# Altium PCB PCB1.PcbDoc
Units mm, origin at the board's own origin, x right, y up, seen from the top; angles counter-clockwise.
Board outline 95 x 95 mm, 2 copper layers (Top Layer, Bottom Layer); 32 components, 53 nets, 150 pads, 4 vias.
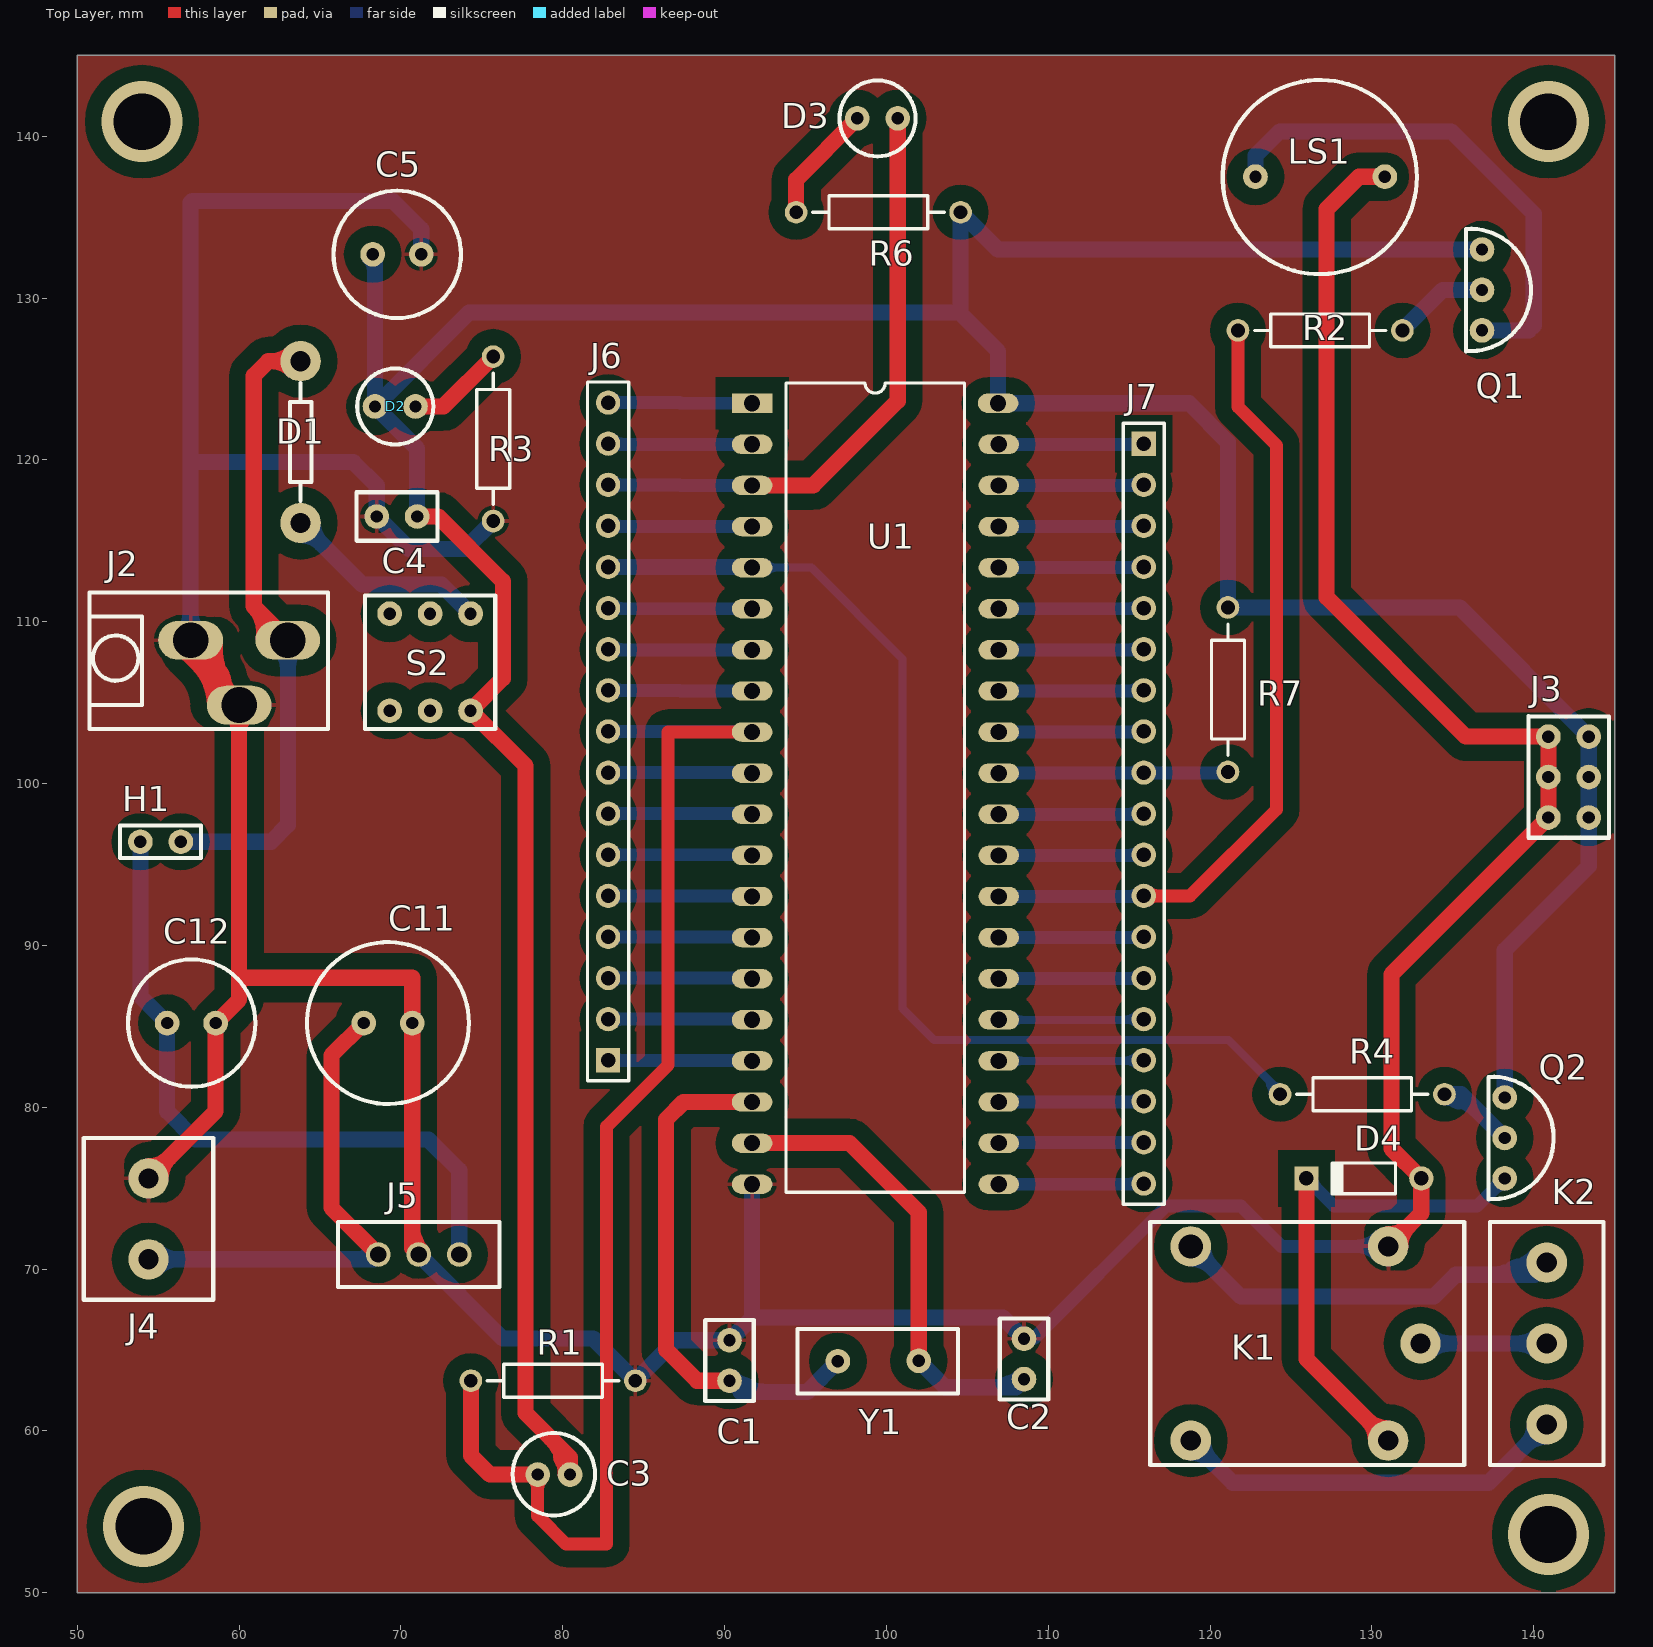
[diagram p0: Top Layer view]
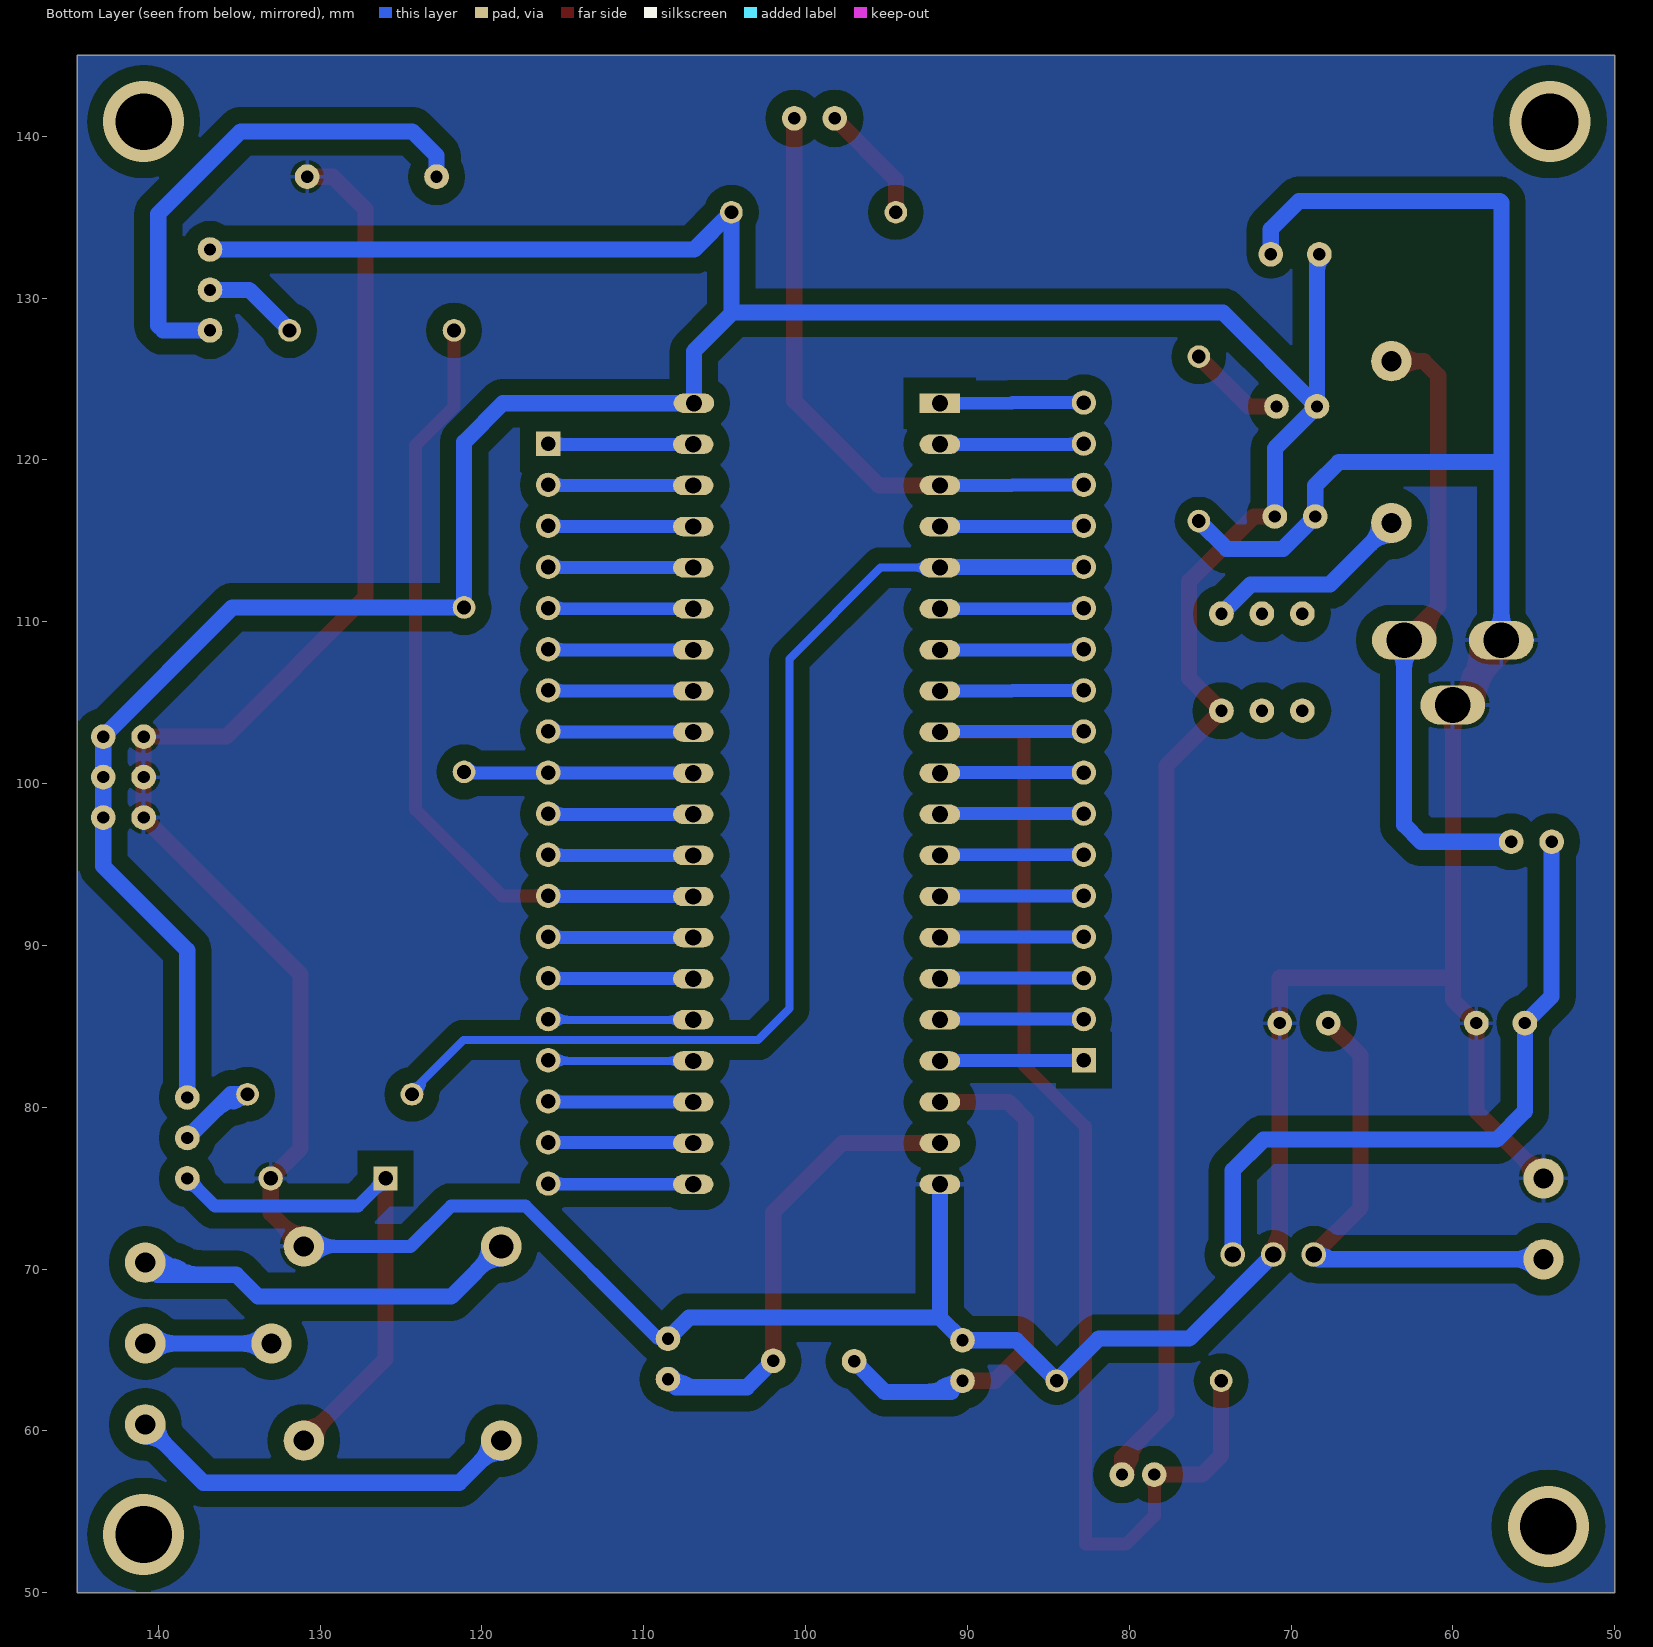
[diagram p1: Bottom Layer view, seen from below]

## Layer stack, top to bottom
Top Layer: signal copper 0.0356
Dielectric: dielectric 0.32, FR-4, Dk 4.8
Bottom Layer: signal copper 0.0356

## Board outline
50,50 50,145 145,145 145,50

## Design rules (kind name [scope] priority, off if disabled: settings)
Clearance Clearance_1 [InPolygon] p1: gap=1
Clearance [All] p2: gap=0.254
PolygonConnect [All] p1: connectstyle=Relief reliefconductorwidth=0.254 reliefentries=4 polygonreliefangle="90 Angle" airgapwidth=0.254
RoutingVias [All] p1: holewidth=0.711 width=1.27 viastyle="Through Hole" minholewidth=0.711 minwidth=1.27 maxholewidth=0.711 maxwidth=1.27
SolderMaskExpansion [All] p1: expansion=0.102
Width [All] p1: maxlimit=2 minlimit=0.2 preferedwidth=1 minimp=50.000000 maximp=50.000000 favimp=50.000000
28 further rules are at their usual default settings.

## Components (designator, comment, footprint, x,y, rotation, side; value= is the part's Value field where it differs from the comment)
C1 "Cap" CAP_104 90.3,65.6 r270 top
C2 "Cap" CAP_104 108.5,65.7 r270 top
C3 "Cap2" CAP_10UF 80.7,57.3 r180 top
C4 "Cap" CAP_104 68.5,116.5 r0 top
C5 "Cap2" Cap_100uF 68.5,132.7 r0 top
C11 "Cap_100uF" CAP_1000UF 69.2,85.2 r0 top
C12 "Cap_100uF" Cap_100uF 55.8,85.2 r0 top
D1 "Diode 1N5408" IN5819 63.8,126.1 r270 top
D2 "LED0" LED 68.4,123.3 r0 top
D3 "LED0" LED 98.2,141.1 r0 top
D4 "Diode 1N4148" DO-35 129.5,75.6 r180 top
H1 "Header 2H" Head2 53.9,96.4 r0 top
J2 "Header 3" POWER_DC5V 65.5,112.1 r180 top
J3 "JPW" JPW 140.9,102.9 r0 top
J4 "Power_DC12V" Power_DC12V 54.4,70.6 r180 top
J5 "7805" 7805 68.6,70.9 r90 top
J6 "Header 17" HDR1X17 82.8,82.9 r90 top
J7 "Header 19" HDR1X19 115.9,121 r270 top
K1 "Relay" Relay 118.8,65.4 r0 top
K2 "CRelay" CRelay 140.8,60.4 r90 top
LS1 "Speaker" Speaker 124.3,137.5 r0 top
Q1 "2N3906" 8550 136.8,133 r270 top
Q2 "2N3906" 8550 138.2,80.6 r270 top
R1 "Res2" AXIAL-0.4 79.4,63.1 r180 top
R2 "Res2" AXIAL-0.4 126.8,128 r0 top
R3 "Res2" AXIAL-0.4 75.7,121.3 r90 top
R4 "Res2" AXIAL-0.4 129.4,80.8 r180 top
R6 "Res2" AXIAL-0.4 99.5,135.3 r180 top
R7 "Res2" AXIAL-0.4 121.1,105.8 r90 top
S2 "SW6" SW6 69.3,110.5 r0 top
U1 "MCU" MCU 91.7,123.5 r0 top
Y1 "XTAL" crystals 97,64.3 r0 top

## Footprints (in the part's own frame and the unit in brackets; to place one, negate y for a bottom-side part, rotate by r counter-clockwise, add the part's x,y. Pads: shape width x height; smd on the part's side, far side on the other; paste and mask are expansions set on the pad)
7805 [mil]
  round 60 hole 39.37: 1(0,0) 2(0,-98.42) 3(0,-196.85)
  silkscreen extent -79,-295 79,98
8550 [mil]
  round 60 hole 30: 1(0,0) 2(98.42,0) 3(196.85,0)
  silkscreen extent -50,-39 248,119
AXIAL-0.4 [mm] "Axial Device, Thru-Hole; 2 Leads; 0.4 in Pin Spacing"
  round 1.4 hole 0.85: 1(-5.08,0) 2(5.08,0)
  silkscreen extent -4.06,-1.02 4.06,1.02
CAP_10UF [mil]
  round 60 hole 30: 1(9.84,0) 2(88.58,0)
  silkscreen extent -51,-101 150,99
Cap_100uF [mil]
  round 60 hole 30: 1(-9.84,0) 2(108.27,0)
  silkscreen extent -105,-155 205,155
CAP_104 [mil]
  round 60 hole 30: 1(0,0) 2(98.43,0)
  silkscreen extent -49,-59 148,59
CAP_1000UF [mil]
  round 60 hole 30: 1(-59.06,0) 2(59.05,0)
  silkscreen extent -197,-197 197,197
CRelay [mm]
  round 2.5 hole 1.25: 1(0,0) 2(5,0) 3(10,0)
  silkscreen extent -2.5,-3.5 12.5,3.5
crystals [mil]
  round 60 hole 30: 1(0,0) 2(196.85,0.98)
  silkscreen extent -98,-79 292,79
DO-35 [mm] "Diode, Axial; Body 3.8 x 1.9 mm (LxDia. max), Lead Dia. 0.53 mm (max)"
  round 1.5 hole 0.9: 1(-3.55,0)
  rect 1.5x1.5 hole 0.9: 2(3.55,0)
  silkscreen extent -1.95,-0.95 2.05,0.95
HDR1X17 [mm] "Connector; Header; 17 Position"
  rect 1.5x1.5 hole 0.9: 1(0,0)
  round 1.5 hole 0.9: 2(2.54,0) 3(5.08,0) 4(7.62,0) 5(10.16,0) 6(12.7,0) 7(15.24,0) 8(17.78,0) 9(20.32,0) 10(22.86,0) 11(25.4,0) 12(27.94,0) 13(30.48,0) 14(33.02,0) 15(35.56,0) 16(38.1,0) 17(40.64,0)
  silkscreen extent -1.27,-1.27 41.91,1.27
HDR1X19 [mm] "Connector; Header; 19 Position"
  rect 1.5x1.5 hole 0.9: 1(0,0)
  round 1.5 hole 0.9: 2(2.54,0) 3(5.08,0) 4(7.62,0) 5(10.16,0) 6(12.7,0) 7(15.24,0) 8(17.78,0) 9(20.32,0) 10(22.86,0) 11(25.4,0) 12(27.94,0) 13(30.48,0) 14(33.02,0) 15(35.56,0) 16(38.1,0) 17(40.64,0) 18(43.18,0) 19(45.72,0)
  silkscreen extent -1.27,-1.27 46.99,1.27
Head2 [mil]
  round 60 hole 30: 1(0,0) 2(98.42,0)
  silkscreen extent -49,-39 148,39
IN5819 [mm]
  round 2.5 hole 1.25: 1(0,0) 2(10,0)
  silkscreen extent 1.35,-0.65 8.62,0.68
JPW [mil]
  round 60 hole 30: 1(0,0) 2(98.43,0) 3(0,-98.43) 4(98.43,-98.43) 5(0,-196.85) 6(98.43,-196.85)
  silkscreen extent -48,-246 148,50
LED [mil]
  round 60 hole 30: 1(0,0) 2(98.42,0)
  silkscreen extent -43,-93 142,93
MCU [mm] "STC89C52RC"
  rect 2.5x1.2 hole 1: 1(0,0)
  oval 2.5x1.2 hole 1: 2(0,-2.54) 3(0,-5.08) 4(0,-7.62) 5(0,-10.16) 6(0,-12.7) 7(0,-15.24) 8(0,-17.78) 9(0,-20.32) 10(0,-22.86) 11(0,-25.4) 12(0,-27.94) 13(0,-30.48) 14(0,-33.02) 15(0,-35.56) 16(0,-38.1) 17(0,-40.64) 18(0,-43.18) 19(0,-45.72) 20(0,-48.26) 21(15.24,-48.26) 22(15.24,-45.72) 23(15.24,-43.18) 24(15.24,-40.64) 25(15.24,-38.1) 26(15.24,-35.56) 27(15.24,-33.02) 28(15.24,-30.48) 29(15.24,-27.94) 30(15.24,-25.4) 31(15.24,-22.86) 32(15.24,-20.32) 33(15.24,-17.78) 34(15.24,-15.24) 35(15.24,-12.7) 36(15.24,-10.16) 37(15.24,-7.62) 38(15.24,-5.08) 39(15.24,-2.54) 40(15.2,0)
  silkscreen extent 2.08,-48.75 13.11,1.25
POWER_DC5V [mm]
  oval 4x2.4 hole 2.2: 1(2.5,3.25) 2(8.5,3.25) 3(5.5,7.25)
  silkscreen extent 0,0.3 14.75,8.72
Power_DC12V [mm]
  round 2.5 hole 1.25: 1(0,0) 2(0,-5)
  silkscreen extent -4,-7.5 4,2.5
Relay [mm] "HLS8L-DC5V-S-C"
  round 2.5 hole 1.25: 1(14.2,0) 3(0,-6) 4(12.2,6) 5(12.2,-6)
  round 2.5 hole 1.5: 2(0,6)
  silkscreen extent -2.5,-7.5 16.9,7.5
Speaker [mil]
  round 60 hole 30: 1(-59.05,0) 2(255.91,0)
  silkscreen extent -139,-237 334,235
SW6 [mil]
  round 60 hole 30: 1(0,0) 2(98.43,0) 3(196.85,0) 4(0,-236.22) 5(98.43,-236.22) 6(196.85,-236.22)
  silkscreen extent -60,-281 257,44

## Part data
C1 C2: "Capacitor"
C3 C5: "Polarized Capacitor (Axial)"
C4: "104"
D1: "3 Amp Medium Power Silicon Rectifier Diode"
D2 D3: "Typical INFRARED GaAs LED"
D4: "High Conductance Fast Diode"
H1: "Header, 2-Pin, Right Angle"
J2: "Header, 3-Pin"
J6: "Header, 17-Pin"
J7: "Header, 19-Pin"
K1: "HLS8L-DC5V-S-C"
LS1: "Loudspeaker"
Q1 Q2: "PNP8550"
R1 R2 R3 R4 R6 R7: "Resistor"
U1: "STC89C52RC"
Y1: "Crystal Oscillator"

## Via types
v1: diameter 5, hole 3.5, Top Layer to Bottom Layer, 4 vias

## Nets (pads, with @x,y where several pads share a name; then routed paths per layer and width w, separated by ;. In a path a pad name is that pad's centre, name@x,y a point inside that pad or via, vN(x,y) a via of type N, cw(c..) or ccw(c..) an arc to the next point about the centre after c; other vN are vias at no path point)
GND: C1.1 C2.1 C4.1 C5.2 C11.2 C12.2 D4.1 J2.2 J2.3 J3.1 J3.3 J3.5 J4.2 J5.2 K1.4 LS1.2 R1.1 R3.1 U1.20 | length 350.4
  Top Layer w0.254: J2.2@57,107.85 J2.2
  Top Layer w1: J4.2 58.55,79.75 C12.2 60,86.65 ; J2.2@57,107.85 J2.3 ; J2.2@57.414,108.266 cw(c55.21,104.93) J2.3@59.127,105.73 ; J2.3@58.691,105.331 ccw(c57.781,106.19) 58.865,106.816 ; 60,86.9 J2.3 ; 60.1,88 70.7,88 C11.2 70.7,71.3 J5.2 ; 70.841,71.854 cw(c70.077,71.413) J5.2@70.866,71.017 ; LS1.2 129.2,137.5 127.2,135.5 127.2,111.5 135.8,102.9 J3.1 J3.3 J3.5 131.2,88.2 131.2,77.45 D4.1 133.05,73.45 K1.4 ; 55.68,76.88 cw(c54.4,78.161) 54.4,76.35 ccw(c54.4,78.161) 55.68,76.88 ; 55.68,76.88 ccw(c56.961,75.6) 55.15,75.6 cw(c56.961,75.6) 55.68,76.88 ; 60,103.16 cw(c61.69,103.16) 60.495,104.355 ccw(c61.69,103.16) 60,103.16 ; 60,103.16 ccw(c58.31,103.16) 59.505,104.355 cw(c58.31,103.16) 60,103.16 ; J2.3 cw(c63.647,108.497) 58.499,108.808 ccw(c63.647,108.497) J2.3 ; 132.28,72.68 cw(c131,73.961) 131,72.15 ccw(c131,73.961) 132.28,72.68 ; 132.28,72.68 ccw(c133.561,71.4) 131.75,71.4 cw(c133.561,71.4) 132.28,72.68 ; J2.2@56.502,108.928 ccw(c57.719,108.855) 56.857,107.993 cw(c57.719,108.855) J2.2@56.502,108.928 ; 57.439,107.411 cw(c54.879,104.85) 58.5,104.85 ccw(c54.879,104.85) 57.439,107.411 ; J2.2@57.501,108.868 ccw(c60.683,108.676) 58.429,106.421 cw(c60.683,108.676) J2.2@57.501,108.868 ; 70.7,72.498 ccw(c72.698,72.498) 71.285,71.085 cw(c72.698,72.498) 70.7,72.498
  Bottom Layer w0.254: J2.2@56.998,108.85 J2.2
  Bottom Layer w0.8: C2.1 109.1,65.7 117.3,73.9 121.9,73.9 124.4,71.4 K1.4 ; 128.948,71.4 cw(c128.948,69.348) 130.399,70.799 ccw(c128.948,69.348) 128.948,71.4 ; 128.948,71.4 ccw(c128.948,73.452) 130.399,72.001 cw(c128.948,73.452) 128.948,71.4
  Bottom Layer w1: J2.2@56.998,108.85 56.998,117.932 ; 56.998,118.002 56.998,135.898 57.1,136 69.5,136 71.25,134.25 C5.2 ; 57.135,119.863 67.056,119.863 68.5,118.419 C4.1 70.5,114.5 73.98,114.5 R3.1 ; J5.2 76.3,65.7 81.88,65.7 R1.1 86.98,65.6 C1.1 91.7,67 ; U1.20 91.7,67 ; C2.1 107.2,67 91.7,67 ; J2.2@56.505,109.345 ccw(c55.316,110.534) 56.998,110.534 cw(c55.316,110.534) J2.2@56.505,109.345 ; 56.998,110.546 ccw(c58.696,110.546) 57.495,109.345 cw(c58.696,110.546) 56.998,110.546
NetC1_2: C1.2 U1.18 Y1.1 | length 38.4
  Top Layer w1: C1.2 88.3,63.1 86.385,65.015 86.385,79.248 87.457,80.32 U1.18
  Bottom Layer w0.254: C1.2 91,62.4
  Bottom Layer w1: C1.2@90.368,62.847 cw(c90.755,61.401) 91.503,62.697 ; 91,62.4 95.1,62.4 Y1.1 ; C1.2@90.485,63.285 ccw(c92.622,65.422) 92.622,62.4 cw(c92.622,65.422) C1.2@90.485,63.285
NetC2_2: C2.2 U1.19 Y1.2 | length 33.4
  Top Layer w1: U1.19 97.72,77.78 102,73.5 Y1.2
  Bottom Layer w0.254: C2.2@108,62.7 C2.2
  Bottom Layer w1: Y1.2 103.625,62.7 C2.2@108,62.7 ; 107.392,62.853 cw(c108.013,61.778) C2.2@108.415,62.952 ; 106.66,62.7 ccw(c106.66,65.04) 108.315,63.385 cw(c106.66,65.04) 106.66,62.7
NetC3_2: C3.2 J6.9 R1.2 U1.9 | length 88.2
  Top Layer w0.8: C3.2 78.45,54.75 80.2,53 82.7,53 82.7,78.8 86.5,82.6 86.5,103.18 U1.9@91.9,103.18 ; 78.45,56.426 cw(c79.324,56.426) 78.706,57.044 ccw(c79.324,56.426) 78.45,56.426 ; 78.45,56.426 ccw(c77.576,56.426) 78.194,57.044 cw(c77.576,56.426) 78.45,56.426
  Top Layer w1: R1.2 74.32,58.48 75.5,57.3 C3.2
  Bottom Layer w0.8: J6.9 U1.9@91.66,103.22 ; 83.645,103.22 cw(c83.645,104.065) 83.047,103.467 ccw(c83.645,104.065) 83.645,103.22 ; 83.645,103.22 ccw(c83.645,102.375) 83.047,102.973 cw(c83.645,102.375) 83.645,103.22
NetC11_1: C11.1 J4.1 J5.1 | length 39.2
  Top Layer w1: C11.1 65.7,83.2 65.7,73.8 J5.1
  Bottom Layer w1: J4.1 J5.1@68.3,70.6 ; 67.799,70.73 cw(c68.091,70.223) J5.1@68.443,70.691 ; 56.211,70.6 cw(c56.211,72.411) 54.93,71.13 ccw(c56.211,72.411) 56.211,70.6 ; 56.211,70.6 ccw(c56.211,68.789) 54.93,70.07 cw(c56.211,68.789) 56.211,70.6 ; 67.243,70.6 ccw(c67.243,72.257) 68.415,71.085 cw(c67.243,72.257) 67.243,70.6
NetC12_1: C12.1 H1.1 J5.3 | length 42.1
  Bottom Layer w1: H1.1 53.9,86.85 C12.1 55.55,79.75 57.3,78 71.7,78 73.6,76.1 J5.3
NetD1_1: D1.1 H1.2 J2.1 | length 54.3
  Top Layer w1: J2.1 60.9,110.95 ; D1.1 61.8,126.1 60.9,125.2 60.9,110.95 ; 60.9,110.95 cw(c59.333,109.383) 61.512,108.978 ccw(c59.333,109.383) 60.9,110.95 ; 61.989,126.1 cw(c61.989,124.289) 63.27,125.57 ccw(c61.989,124.289) 61.989,126.1 ; 61.989,126.1 ccw(c61.989,127.911) 63.27,126.63 cw(c61.989,127.911) 61.989,126.1
  Bottom Layer w0.254: J2.1 J2.1@63.017,108.85
  Bottom Layer w1: H1.2 61.976,96.4 63.017,97.441 J2.1@63.017,108.85 ; J2.1@62.505,108.355 cw(c61.268,107.118) 63.017,107.118 ccw(c61.268,107.118) J2.1@62.505,108.355 ; 63.017,107.202 cw(c64.648,107.202) 63.495,108.355 ccw(c64.648,107.202) 63.017,107.202
NetD1_2: D1.2 S2.3 | length 18.5
  Bottom Layer w1: D1.2 67.6,112.3 72.5,112.3 S2.3 ; 65.08,114.82 cw(c66.361,116.1) 64.55,116.1 ccw(c66.361,116.1) 65.08,114.82 ; 65.08,114.82 ccw(c63.8,113.539) 63.8,115.35 cw(c63.8,113.539) 65.08,114.82
NetD2_2: D2.2 R3.2 | length 6.1
  Top Layer w1: D2.2 72.62,123.3 R3.2
NetD3_1: D3.1 R6.2 | length 7.4
  Top Layer w1: R6.2 94.42,137.32 D3.1
NetD3_2: D3.2 J6.15 U1.3 | length 40.2
  Top Layer w1: U1.3 95.479,118.42 100.7,123.641 D3.2
  Bottom Layer w0.254: 87.224,118.46 87.264,118.42
  Bottom Layer w0.8: J6.15 87.224,118.46 ; 87.264,118.42 U1.3 ; 83.645,118.46 cw(c83.645,119.305) 83.047,118.707 ccw(c83.645,119.305) 83.645,118.46 ; 83.645,118.46 ccw(c83.645,117.615) 83.047,118.213 cw(c83.645,117.615) 83.645,118.46
NetD4_2: D4.2 K1.5 Q2.3 | length 43
  Top Layer w1: D4.2 125.95,64.45 K1.5 ; 129.72,60.68 cw(c128.439,59.4) 130.25,59.4 ccw(c128.439,59.4) 129.72,60.68 ; 129.72,60.68 ccw(c131,61.961) 131,60.15 cw(c131,61.961) 129.72,60.68
  Bottom Layer w0.8: D4.2 127.65,73.9 136.5,73.9 Q2.3 ; D4.2@126.548,75.003 cw(c127.145,75.6) 126.3,75.6 ccw(c127.145,75.6) D4.2@126.548,75.003 ; D4.2@126.548,75.003 ccw(c125.95,74.405) 125.95,75.25 cw(c125.95,74.405) D4.2@126.548,75.003 ; 137.582,74.982 cw(c138.2,74.364) 138.2,75.238 ccw(c138.2,74.364) 137.582,74.982 ; 137.582,74.982 ccw(c136.964,75.6) 137.838,75.6 cw(c136.964,75.6) 137.582,74.982
NetJ6_1: J6.1 U1.17 | length 11.5
  Bottom Layer w0.8: J6.1 U1.17@91.66,82.9 ; 83.645,82.9 cw(c83.645,83.745) 83.047,83.147 ccw(c83.645,83.745) 83.645,82.9 ; 83.645,82.9 ccw(c83.645,82.055) 83.047,82.653 cw(c83.645,82.055) 83.645,82.9
NetJ6_2: J6.2 U1.16 | length 11.5
  Bottom Layer w0.8: J6.2 U1.16@91.66,85.44 ; 83.645,85.44 cw(c83.645,86.285) 83.047,85.687 ccw(c83.645,86.285) 83.645,85.44 ; 83.645,85.44 ccw(c83.645,84.595) 83.047,85.193 cw(c83.645,84.595) 83.645,85.44
NetJ6_3: J6.3 U1.15 | length 11.5
  Bottom Layer w0.8: J6.3 U1.15@91.66,87.98 ; 83.645,87.98 cw(c83.645,88.825) 83.047,88.227 ccw(c83.645,88.825) 83.645,87.98 ; 83.645,87.98 ccw(c83.645,87.135) 83.047,87.733 cw(c83.645,87.135) 83.645,87.98
NetJ6_4: J6.4 U1.14 | length 11.5
  Bottom Layer w0.8: J6.4 U1.14@91.66,90.52 ; 83.645,90.52 cw(c83.645,91.365) 83.047,90.767 ccw(c83.645,91.365) 83.645,90.52 ; 83.645,90.52 ccw(c83.645,89.675) 83.047,90.273 cw(c83.645,89.675) 83.645,90.52
NetJ6_5: J6.5 U1.13 | length 11.5
  Bottom Layer w0.8: J6.5 U1.13@91.66,93.06 ; 83.645,93.06 cw(c83.645,93.905) 83.047,93.307 ccw(c83.645,93.905) 83.645,93.06 ; 83.645,93.06 ccw(c83.645,92.215) 83.047,92.813 cw(c83.645,92.215) 83.645,93.06
NetJ6_6: J6.6 U1.12 | length 11.5
  Bottom Layer w0.8: J6.6 U1.12@91.66,95.6 ; 83.645,95.6 cw(c83.645,96.445) 83.047,95.847 ccw(c83.645,96.445) 83.645,95.6 ; 83.645,95.6 ccw(c83.645,94.755) 83.047,95.353 cw(c83.645,94.755) 83.645,95.6
NetJ6_7: J6.7 U1.11 | length 11.5
  Bottom Layer w0.8: J6.7 U1.11@91.66,98.14 ; 83.645,98.14 cw(c83.645,98.985) 83.047,98.387 ccw(c83.645,98.985) 83.645,98.14 ; 83.645,98.14 ccw(c83.645,97.295) 83.047,97.893 cw(c83.645,97.295) 83.645,98.14
NetJ6_8: J6.8 U1.10 | length 11.5
  Bottom Layer w0.8: J6.8 U1.10@91.66,100.68 ; 83.645,100.68 cw(c83.645,101.525) 83.047,100.927 ccw(c83.645,101.525) 83.645,100.68 ; 83.645,100.68 ccw(c83.645,99.835) 83.047,100.433 cw(c83.645,99.835) 83.645,100.68
NetJ6_10: J6.10 U1.8 | length 11.6
  Bottom Layer w0.254: 87.224,105.76 87.264,105.72
  Bottom Layer w0.8: J6.10 87.224,105.76 ; 87.264,105.72 U1.8 ; 83.645,105.76 cw(c83.645,106.605) 83.047,106.007 ccw(c83.645,106.605) 83.645,105.76 ; 83.645,105.76 ccw(c83.645,104.915) 83.047,105.513 cw(c83.645,104.915) 83.645,105.76
NetJ6_11: J6.11 U1.7 | length 10.5
  Bottom Layer w0.8: J6.11 82.84,108.26 U1.7 ; J6.11@83.047,108.547 ccw(c83.742,109.242) 83.742,108.26 cw(c83.742,109.242) J6.11@83.047,108.547
NetJ6_12: J6.12 U1.6 | length 10.5
  Bottom Layer w0.8: J6.12 82.84,110.8 U1.6 ; J6.12@83.047,111.087 ccw(c83.742,111.782) 83.742,110.8 cw(c83.742,111.782) J6.12@83.047,111.087
NetJ6_13: J6.13 R4.2 U1.5 | length 74.7
  Bottom Layer w0.5: U1.5 95.36,113.34 101,107.7 101,86.1 102.946,84.154 121.146,84.154 124.32,80.98 R4.2 ; 123.714,81.383 ccw(c124.599,81.621) R4.2@124.304,80.753 ; 93.195,113.34 cw(c93.195,114.185) 92.597,113.587 ccw(c93.195,114.185) 93.195,113.34 ; 93.195,113.34 ccw(c93.195,112.495) 92.597,113.092 cw(c93.195,112.495) 93.195,113.34 ; 123.425,81.875 cw(c122.349,80.8) 123.87,80.8 ccw(c122.349,80.8) 123.425,81.875 ; 123.859,81.441 ccw(c124.32,81.902) 124.32,81.25 cw(c124.32,81.902) 123.859,81.441
  Bottom Layer w1: J6.13 U1.5@91.66,113.38
NetJ6_14: J6.14 U1.4 | length 10.5
  Bottom Layer w0.254: 87.224,115.92 87.264,115.88
  Bottom Layer w0.8: J6.14@82.84,115.88 87.264,115.88 U1.4 ; J6.14@83.047,116.167 ccw(c83.742,116.862) 83.742,115.88 cw(c83.742,116.862) J6.14@83.047,116.167
NetJ6_16: J6.16 U1.2 | length 10.5
  Bottom Layer w0.8: J6.16 82.84,120.96 U1.2 ; J6.16@83.047,121.247 ccw(c83.742,121.942) 83.742,120.96 cw(c83.742,121.942) J6.16@83.047,121.247
NetJ6_17: J6.17 U1.1 | length 11.6
  Bottom Layer w0.254: 87.224,123.54 87.264,123.5
  Bottom Layer w0.8: J6.17 87.224,123.54 ; 87.264,123.5 U1.1 ; 83.645,123.54 cw(c83.645,124.385) 83.047,123.787 ccw(c83.645,124.385) 83.645,123.54 ; 83.645,123.54 ccw(c83.645,122.695) 83.047,123.293 cw(c83.645,122.695) 83.645,123.54
NetJ7_1: J7.1 U1.39 | length 10.5
  Bottom Layer w0.8: U1.39 115.86,120.96 J7.1 ; 114.958,120.96 ccw(c114.958,121.942) 115.653,121.247 cw(c114.958,121.942) 114.958,120.96
NetJ7_2: J7.2 U1.38 | length 10.5
  Bottom Layer w0.8: U1.38 J7.2@115.86,118.42 ; 114.958,118.42 ccw(c114.958,119.402) 115.653,118.707 cw(c114.958,119.402) 114.958,118.42
NetJ7_3: J7.3 U1.37 | length 10.5
  Bottom Layer w0.8: U1.37 J7.3@115.86,115.88 ; 114.958,115.88 ccw(c114.958,116.862) 115.653,116.167 cw(c114.958,116.862) 114.958,115.88
NetJ7_4: J7.4 U1.36 | length 10.5
  Bottom Layer w0.8: U1.36 J7.4@115.86,113.34 ; 114.958,113.34 ccw(c114.958,114.322) 115.653,113.627 cw(c114.958,114.322) 114.958,113.34
NetJ7_5: J7.5 U1.35 | length 10.5
  Bottom Layer w0.8: U1.35 J7.5@115.86,110.8 ; 114.958,110.8 ccw(c114.958,111.782) 115.653,111.087 cw(c114.958,111.782) 114.958,110.8
NetJ7_6: J7.6 U1.34 | length 10.5
  Bottom Layer w0.8: U1.34 J7.6@115.86,108.26 ; 114.958,108.26 ccw(c114.958,109.242) 115.653,108.547 cw(c114.958,109.242) 114.958,108.26
NetJ7_7: J7.7 U1.33 | length 10.5
  Bottom Layer w0.8: U1.33 J7.7@115.86,105.72 ; 114.958,105.72 ccw(c114.958,106.702) 115.653,106.007 cw(c114.958,106.702) 114.958,105.72
NetJ7_8: J7.8 U1.32 | length 10.5
  Bottom Layer w0.8: U1.32 J7.8@115.86,103.18 ; 114.958,103.18 ccw(c114.958,104.162) 115.653,103.467 cw(c114.958,104.162) 114.958,103.18
NetJ7_9: J7.9 R7.1 U1.31 | length 18.8
  Bottom Layer w0.8: U1.31 121.02,100.64 R7.1 ; 114.958,100.64 ccw(c114.958,101.622) 115.653,100.927 cw(c114.958,101.622) 114.958,100.64 ; J7.9@116.147,100.927 ccw(c116.842,101.622) 116.842,100.64 cw(c116.842,101.622) J7.9@116.147,100.927 ; 120.183,100.64 ccw(c120.183,101.637) 120.888,100.932 cw(c120.183,101.637) 120.183,100.64
NetJ7_10: J7.10 U1.30 | length 10.5
  Bottom Layer w0.8: U1.30 J7.10@115.86,98.1 ; 114.958,98.1 ccw(c114.958,99.082) 115.653,98.387 cw(c114.958,99.082) 114.958,98.1
NetJ7_11: J7.11 U1.29 | length 10.5
  Bottom Layer w0.8: U1.29 J7.11@115.86,95.56 ; 114.958,95.56 ccw(c114.958,96.542) 115.653,95.847 cw(c114.958,96.542) 114.958,95.56
NetJ7_12: J7.12 R2.1 U1.28 | length 56.4
  Top Layer w0.8: J7.12 118.76,93.06 124.1,98.4 124.1,120.9 121.72,123.28 R2.1 ; 116.745,93.06 cw(c116.745,93.905) 116.147,93.307 ccw(c116.745,93.905) 116.745,93.06 ; 116.745,93.06 ccw(c116.745,92.215) 116.147,92.813 cw(c116.745,92.215) 116.745,93.06 ; 121.72,127.276 cw(c122.444,127.276) 121.932,127.788 ccw(c122.444,127.276) 121.72,127.276 ; 121.72,127.276 ccw(c120.996,127.276) 121.508,127.788 cw(c120.996,127.276) 121.72,127.276
  Bottom Layer w0.8: U1.28 J7.12@115.86,93.02 ; 114.958,93.02 ccw(c114.958,94.002) 115.653,93.307 cw(c114.958,94.002) 114.958,93.02
NetJ7_13: J7.13 U1.27 | length 10.5
  Bottom Layer w0.8: U1.27 J7.13@115.86,90.48 ; 114.958,90.48 ccw(c114.958,91.462) 115.653,90.767 cw(c114.958,91.462) 114.958,90.48
NetJ7_14: J7.14 U1.26 | length 10.5
  Bottom Layer w0.8: U1.26 J7.14@115.86,87.94 ; 114.958,87.94 ccw(c114.958,88.922) 115.653,88.227 cw(c114.958,88.922) 114.958,87.94
NetJ7_15: J7.15 U1.25 | length 15.4
  Bottom Layer w0.5: U1.25 J7.15@115.86,85.4 ; 108.435,85.4 cw(c108.435,86.245) 107.837,85.647 ccw(c108.435,86.245) 108.435,85.4 ; 108.435,85.4 ccw(c108.435,84.555) 107.837,85.152 cw(c108.435,84.555) 108.435,85.4 ; 114.596,85.4 ccw(c114.596,86.744) 115.546,85.794 cw(c114.596,86.744) 114.596,85.4 ; 114.79,85.4 cw(c114.79,84.33) 115.546,85.086 ccw(c114.79,84.33) 114.79,85.4
NetJ7_16: J7.16 U1.24 | length 15.4
  Bottom Layer w0.5: U1.24 J7.16@115.86,82.86 ; 108.435,82.86 cw(c108.435,83.705) 107.837,83.107 ccw(c108.435,83.705) 108.435,82.86 ; 108.435,82.86 ccw(c108.435,82.015) 107.837,82.612 cw(c108.435,82.015) 108.435,82.86 ; 114.596,82.86 ccw(c114.596,84.204) 115.546,83.254 cw(c114.596,84.204) 114.596,82.86 ; 114.79,82.86 cw(c114.79,81.79) 115.546,82.546 ccw(c114.79,81.79) 114.79,82.86
NetJ7_17: J7.17 U1.23 | length 10.5
  Bottom Layer w0.8: U1.23 J7.17@115.86,80.32 ; 114.958,80.32 ccw(c114.958,81.302) 115.653,80.607 cw(c114.958,81.302) 114.958,80.32
NetJ7_18: J7.18 U1.22 | length 11.6
  Bottom Layer w0.8: U1.22@106.98,77.82 J7.18 ; 115.055,77.82 cw(c115.055,76.975) 115.653,77.573 ccw(c115.055,76.975) 115.055,77.82 ; 115.055,77.82 ccw(c115.055,78.665) 115.653,78.067 cw(c115.055,78.665) 115.055,77.82
NetJ7_19: J7.19 U1.21 | length 10.5
  Bottom Layer w0.8: U1.21 J7.19@115.86,75.24 ; 114.958,75.24 ccw(c114.958,76.222) 115.653,75.527 cw(c114.958,76.222) 114.958,75.24
NetK1_1: K1.1 K2.2 | length 19.2
  Bottom Layer w1: K1.1 K2.2 ; 134.811,65.4 cw(c134.811,67.211) 133.53,65.93 ccw(c134.811,67.211) 134.811,65.4 ; 134.811,65.4 ccw(c134.811,63.589) 133.53,64.87 cw(c134.811,63.589) 134.811,65.4 ; 138.989,65.4 cw(c138.989,63.589) 140.27,64.87 ccw(c138.989,63.589) 138.989,65.4 ; 138.989,65.4 ccw(c138.989,67.211) 140.27,65.93 cw(c138.989,67.211) 138.989,65.4
NetK1_2: K1.2 K2.3 | length 41.6
  Bottom Layer w0.254: K2.3@140.047,69.647 K2.3
  Bottom Layer w1: K1.2 121.9,68.3 133.827,68.3 135.173,69.647 K2.3@140.047,69.647 ; 138.667,70.005 cw(c139.37,68.789) K2.3@140.302,69.839 ; 120.08,70.12 cw(c121.361,71.4) 119.55,71.4 ccw(c121.361,71.4) 120.08,70.12 ; 120.08,70.12 ccw(c118.8,68.839) 118.8,70.65 cw(c118.8,68.839) 120.08,70.12 ; 137.171,69.647 ccw(c137.171,74.029) 140.27,70.93 cw(c137.171,74.029) 137.171,69.647 ; 139.585,69.647 ccw(c139.585,71.615) 140.977,70.223 cw(c139.585,71.615) 139.585,69.647
NetK1_3: K1.3 K2.1 | length 35.9
  Bottom Layer w1: K1.3 121.4,56.8 137.2,56.8 K2.1 ; 120.08,58.12 cw(c121.361,59.4) 119.55,59.4 ccw(c121.361,59.4) 120.08,58.12 ; 120.08,58.12 ccw(c118.8,56.839) 118.8,58.65 cw(c118.8,56.839) 120.08,58.12 ; 139.52,59.12 cw(c140.8,57.839) 140.8,59.65 ccw(c140.8,57.839) 139.52,59.12 ; 139.52,59.12 ccw(c138.239,60.4) 140.05,60.4 cw(c138.239,60.4) 139.52,59.12
NetLS1_1: LS1.1 Q1.3 | length 31.5
  Bottom Layer w1: LS1.1 122.8,138.8 124.3,140.3 134.9,140.3 140,135.2 140,128.3 139.7,128 Q1.3
NetQ1_2: Q1.2 R2.2 | length 6
  Bottom Layer w1: R2.2 134.38,130.5 Q1.2
NetQ2_2: Q2.2 R4.1 | length 10.4
  Bottom Layer w1: R4.1 135.5,80.8 Q2.2 ; R4.1@134.653,80.9 ccw(c135.643,81.471) 135.347,80.368 ; R4.1@134.48,80.6 cw(c134.48,77.655) 136.563,79.737 ccw(c134.48,77.655) R4.1@134.48,80.6
VCC: C3.1 C4.2 C5.1 D2.1 J3.2 J3.4 J3.6 Q1.1 Q2.1 R6.1 R7.2 S2.6 U1.40 | length 250.7
  Top Layer w1: C4.2 72.3,116.5 76.3,112.5 76.3,106.5 S2.6 77.7,101.1 77.7,61.1 80.45,58.35 C3.1 ; 79.884,58.436 ccw(c81.329,58.823) C3.1@80.581,57.527 ; 79.26,59.54 cw(c77.021,57.3) 80.188,57.3 ccw(c77.021,57.3) 79.26,59.54
  Bottom Layer w1: C5.1 68.4,132.55 D2.1 ; C4.2 71,120.7 D2.1 ; 104.5,129.1 74.2,129.1 D2.1 ; Q1.1 106.88,133 R6.1 104.58,129.02 106.9,126.7 U1.40 118.7,123.5 121.1,121.1 R7.2 135.42,110.88 J3.2 J3.4 J3.6 143.4,94.9 138.2,89.7 Q2.1 ; C5.1@68.065,132.515 cw(c67.255,131.705) 68.4,131.705 ccw(c67.255,131.705) C5.1@68.065,132.515
pads on no net: S2.1 S2.2 S2.4 S2.5
copper on no net:
  other v1: 140.9,53.6 54.1,54.1 54,140.9 140.9,140.9

## Polygon pours and split planes (outlines as drawn)
GND on Top Layer "Bottom Layer-No Net" (solid, remove dead copper, pour order 39): 50,50 145,50 145,145 50,145 50,50
GND on Bottom Layer "Bottom Layer-No Net" (solid, remove dead copper, pour order 41): 50,50 145,50 145,145 50,145 50,50

## Silkscreen, mask and mechanical layers (free items; w line width, h text height)
Mechanical 1:
  the board outline again, w0.254